# EAGLE board Power Up 4.0 (EAGLE 7.6.0)
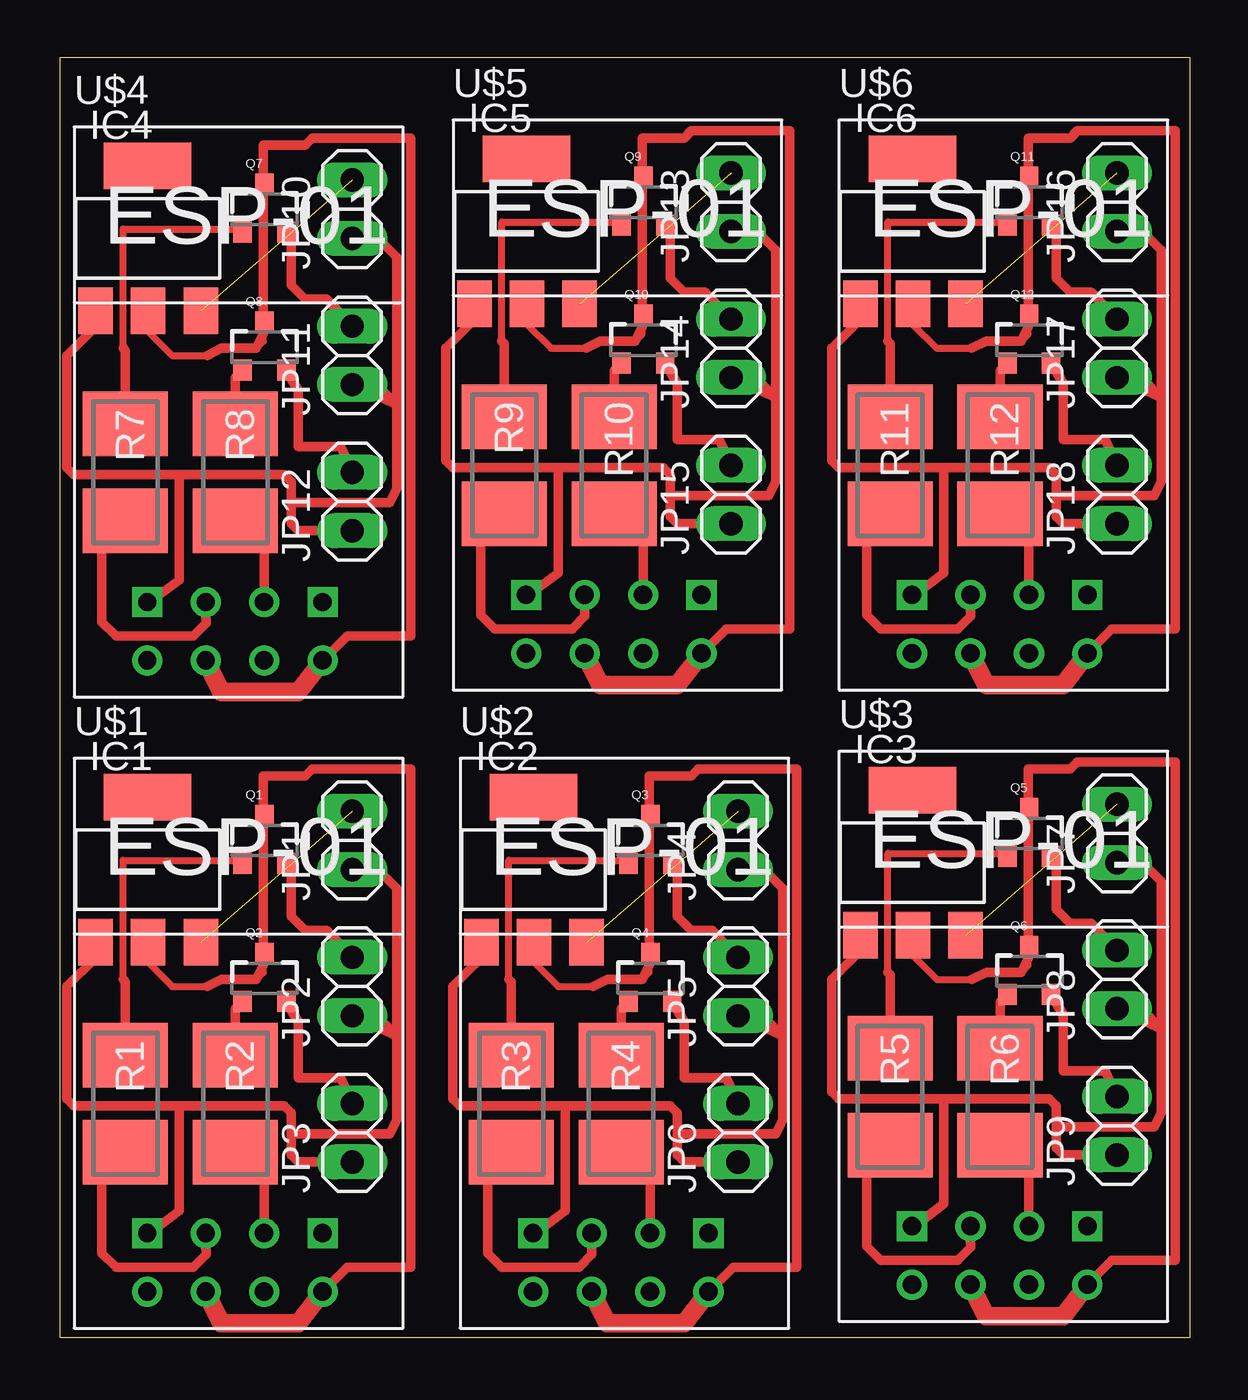
[diagram p0: board, top side]

Size 49.1 x 55.62 mm. Coordinates in mm from the lower left corner, seen from the top.
Outline: 0,0 49.1,0 49.1,55.62 0,55.62 0,0
Copper layers (1*16): Top 0.035mm / dielectric 1.5mm / Bottom 0.035mm
Design rules "default": minimum track width 10mil, minimum drill 24mil, track to track 8mil, track to pad 8mil, pad to pad 8mil, via to via 8mil, smd to smd 8mil, copper to edge 40mil, drill to drill 8mil, minimum pad ring 10mil, minimum via ring 8mil, stop-mask expansion 4mil, vias tented up to drill 0mil, thermal gap 10mil

## Footprints (pad centres in the part's own frame; a part is rotated, then mirrored left to right if it is on the bottom)
SOT223 = smd 1.499 x 2.007: 1 -2.261,-3.15; 2 0.025,-3.15; 3 2.311,-3.15 | smd 3.81 x 2.007: 4 0,3.15
1X02 = drill 1.016 long: 1 -1.27,0; 2 1.27,0
SOT23-3 = smd 0.8 x 0.9: 1 -0.95,-1; 2 0.95,-1; 3 0,1.1
SMS-WAV = smd 2.8 x 3.7: 1 2.108,0; 2 -2.108,0
ESP01 = drill 0.8: CH_PD -1.285,-8.178; GPIO0 1.255,-5.638; GPIO2 -1.285,-5.638; RST 1.255,-8.178; TX -3.825,-8.178; VCC 3.795,-8.178 | drill 0.8 square: GND -3.825,-5.638; RX 3.795,-5.638

## Placement (x,y rotation side)
IC1  REG1117  [SOT223]  3.81,20.32 0 top
IC2  REG1117  [SOT223]  20.57,20.32 0 top
IC3  REG1117  [SOT223]  37.03,20.62 0 top
IC4  REG1117  [SOT223]  3.81,47.75 0 top
IC5  REG1117  [SOT223]  20.27,48.06 0 top
IC6  REG1117  [SOT223]  37.03,48.06 0 top
JP1  Power  [1X02]  12.7,21.59 90 top
JP2  M1  [1X02]  12.7,15.24 90 top
JP3  M2  [1X02]  12.7,8.89 90 top
JP4  Power  [1X02]  29.46,21.59 90 top
JP5  M1  [1X02]  29.46,15.24 90 top
JP6  M2  [1X02]  29.46,8.89 90 top
JP7  Power  [1X02]  45.92,21.89 90 top
JP8  M1  [1X02]  45.92,15.54 90 top
JP9  M2  [1X02]  45.92,9.19 90 top
JP10  Power  [1X02]  12.7,49.02 90 top
JP11  M1  [1X02]  12.7,42.67 90 top
JP12  M2  [1X02]  12.7,36.32 90 top
JP13  Power  [1X02]  29.16,49.33 90 top
JP14  M1  [1X02]  29.16,42.98 90 top
JP15  M2  [1X02]  29.16,36.63 90 top
JP16  Power  [1X02]  45.92,49.33 90 top
JP17  M1  [1X02]  45.92,42.98 90 top
JP18  M2  [1X02]  45.92,36.63 90 top
Q1  MPSA42  [SOT23-3]  8.89,21.59 0 top
Q2  MPSA42  [SOT23-3]  8.89,15.6 0 top
Q3  MPSA42  [SOT23-3]  25.65,21.59 0 top
Q4  MPSA42  [SOT23-3]  25.65,15.6 0 top
Q5  MPSA42  [SOT23-3]  42.11,21.89 0 top
Q6  MPSA42  [SOT23-3]  42.11,15.9 0 top
Q7  MPSA42  [SOT23-3]  8.89,49.02 0 top
Q8  MPSA42  [SOT23-3]  8.89,43.03 0 top
Q9  MPSA42  [SOT23-3]  25.35,49.33 0 top
Q10  MPSA42  [SOT23-3]  25.35,43.33 0 top
Q11  MPSA42  [SOT23-3]  42.11,49.33 0 top
Q12  MPSA42  [SOT23-3]  42.11,43.33 0 top
R1  [SMS-WAV]  2.84,10.16 270 top
R2  [SMS-WAV]  7.62,10.16 270 top
R3  [SMS-WAV]  19.61,10.16 270 top
R4  [SMS-WAV]  24.38,10.16 270 top
R5  [SMS-WAV]  36.07,10.46 270 top
R6  [SMS-WAV]  40.84,10.46 270 top
R7  [SMS-WAV]  2.84,37.59 270 top
R8  [SMS-WAV]  7.62,37.59 270 top
R9  [SMS-WAV]  19.3,37.9 270 top
R10  [SMS-WAV]  24.08,37.9 270 top
R11  [SMS-WAV]  36.07,37.9 270 top
R12  [SMS-WAV]  40.84,37.9 270 top
U$1  ESP01  [ESP01]  7.62,10.16 0 top
U$2  ESP01  [ESP01]  24.38,10.16 0 top
U$3  ESP01  [ESP01]  40.84,10.46 0 top
U$4  ESP01  [ESP01]  7.62,37.59 0 top
U$5  ESP01  [ESP01]  24.08,37.9 0 top
U$6  ESP01  [ESP01]  40.84,37.9 0 top

## Library data of the parts
IC1-IC6 = burr-brown; MPN: REG1117; OC_FARNELL: 1097566; OC_NEWARK: 14P6981
JP1-JP18 = pinhead
Q1-Q12 = SparkFun-DiscreteSemi; PROD_ID: TRANS-09116
R1-R12 = resistor-shunt; OC_FARNELL: unknown; OC_NEWARK: unknown
U$1-U$6 = esp8266modules

## Nets
N$1: Q1.1 R1.2
N$2: Q2.1 R2.2
N$3: IC1.1 JP1.1 JP2.1 JP3.1 U$1.GND
N$4: IC1.2 Q1.3 Q2.3 U$1.CH_PD U$1.VCC
N$5: IC1.3 JP1.2
N$6: R1.1 U$1.GPIO2
N$7: R2.1 U$1.GPIO0
N$8: JP2.2 Q1.2
N$9: JP3.2 Q2.2
N$10: IC2.1 JP4.1 JP5.1 JP6.1 U$2.GND
N$11: IC2.2 Q3.3 Q4.3 U$2.CH_PD U$2.VCC
N$12: IC2.3 JP4.2
N$13: Q3.1 R3.2
N$14: Q4.1 R4.2
N$15: R3.1 U$2.GPIO2
N$16: R4.1 U$2.GPIO0
N$17: JP5.2 Q3.2
N$18: JP6.2 Q4.2
N$19: IC3.1 JP7.1 JP8.1 JP9.1 U$3.GND
N$20: IC3.2 Q5.3 Q6.3 U$3.CH_PD U$3.VCC
N$21: IC3.3 JP7.2
N$22: Q5.1 R5.2
N$23: Q6.1 R6.2
N$24: R5.1 U$3.GPIO2
N$25: R6.1 U$3.GPIO0
N$26: JP8.2 Q5.2
N$27: JP9.2 Q6.2
N$28: IC4.1 JP10.1 JP11.1 JP12.1 U$4.GND
N$29: IC4.2 Q7.3 Q8.3 U$4.CH_PD U$4.VCC
N$30: IC4.3 JP10.2
N$31: Q7.1 R7.2
N$32: Q8.1 R8.2
N$33: R7.1 U$4.GPIO2
N$34: R8.1 U$4.GPIO0
N$35: JP11.2 Q7.2
N$36: JP12.2 Q8.2
N$37: IC5.1 JP13.1 JP14.1 JP15.1 U$5.GND
N$38: IC5.2 Q9.3 Q10.3 U$5.CH_PD U$5.VCC
N$39: IC5.3 JP13.2
N$40: Q9.1 R9.2
N$41: Q10.1 R10.2
N$42: R9.1 U$5.GPIO2
N$43: R10.1 U$5.GPIO0
N$44: JP14.2 Q9.2
N$45: JP15.2 Q10.2
N$46: IC6.1 JP16.1 JP17.1 JP18.1 U$6.GND
N$47: IC6.2 Q11.3 Q12.3 U$6.CH_PD U$6.VCC
N$48: IC6.3 JP16.2
N$49: Q11.1 R11.2
N$50: Q12.1 R12.2
N$51: R11.1 U$6.GPIO2
N$52: R12.1 U$6.GPIO0
N$53: JP17.2 Q11.2
N$54: JP18.2 Q12.2

## Tracks (layer width: path | path; a pad name or v marks a point on that pad's centre or on a via)
N$1
  Top 0.305: 2.74,15.54 2.74,20.73 7.8,20.73 Q1.1
  Top 0.406: R1.2 2.85,15.44 2.74,15.54
N$2
  Top 0.406: R2.2 7.62,14.28 Q2.1
N$3
  Top 0.406: U$1.GND 3.91,4.52 5.18,5.49 5.18,10.06 | 5.18,10.06 9.75,10.06 10.06,9.75 10.06,8.84 | 10.06,8.84 10.06,7.92 10.36,7.62 JP3.1 | IC1.1 1.55,16.48 0.3,15.24 0.3,10.36 0.61,10.06 5.18,10.06 | 10.06,8.84 14.33,8.84 14.63,9.45 14.63,13.11 | 14.63,13.11 JP2.1 13.77,13.97 14.63,13.11 | 14.63,13.11 14.63,19.51 14.02,20.12 12.9,20.12 JP1.1
N$4
  Top 0.305: IC1.2 3.83,16.28 4.88,15.24 6.4,15.24 | 8.53,15.54 8.84,15.85 8.84,16.15 8.84,16.64 Q2.3 Q1.3
  Top 0.406: 6.4,15.24 7.01,15.54 8.53,15.54 8.84,16.15 8.84,24.38 10.67,24.38 10.97,24.69 15.24,24.69 15.24,3.05 12.48,3.05 U$1.VCC
  Top 0.813: U$1.CH_PD 7.01,0.61 10.36,0.61 U$1.VCC
N$5  (1 unrouted)
N$6
  Top 0.406: U$1.GPIO2 6.33,3.83 6.35,3.81 6.35,3.61 5.79,3.05 2.44,3.05 1.83,3.66 1.83,7.34 R1.1
N$7
  Top 0.406: U$1.GPIO0 8.88,6.8 R2.1
N$8
  Top 0.406: JP2.2 11.58,17.68 10.67,17.68 10.06,18.29 10.06,20.37 Q1.2
N$9
  Top 0.406: JP3.2 12.19,11.28 10.36,11.28 10.36,13.72 Q2.2
N$10
  Top 0.406: U$2.GND 20.68,4.52 21.95,5.49 21.95,10.06 | 21.95,10.06 26.52,10.06 26.82,9.75 26.82,8.84 | 26.82,8.84 26.82,7.92 27.13,7.62 JP6.1 | IC2.1 18.31,16.48 17.07,15.24 17.07,10.36 17.37,10.06 21.95,10.06 | 26.82,8.84 31.09,8.84 31.39,9.45 31.39,13.11 | 31.39,13.11 JP5.1 30.53,13.97 31.39,13.11 | 31.39,13.11 31.39,19.51 30.79,20.12 29.67,20.12 JP4.1
N$11
  Top 0.305: IC2.2 20.6,16.28 21.64,15.24 23.16,15.24 | 25.3,15.54 25.6,15.85 25.6,16.15 25.6,16.64 Q4.3 Q3.3
  Top 0.406: 23.16,15.24 23.77,15.54 25.3,15.54 25.6,16.15 25.6,24.38 27.43,24.38 27.74,24.69 32,24.69 32,3.05 29.24,3.05 U$2.VCC
  Top 0.813: U$2.CH_PD 23.77,0.61 27.13,0.61 U$2.VCC
N$12  (1 unrouted)
N$13
  Top 0.305: 19.51,15.54 19.51,20.73 24.57,20.73 Q3.1
  Top 0.406: R3.2 19.61,15.44 19.51,15.54
N$14
  Top 0.406: R4.2 24.38,14.28 Q4.1
N$15
  Top 0.406: U$2.GPIO2 23.1,3.83 23.11,3.81 23.11,3.61 22.55,3.05 19.2,3.05 18.59,3.66 18.59,7.34 R3.1
N$16
  Top 0.406: U$2.GPIO0 25.64,6.8 R4.1
N$17
  Top 0.406: JP5.2 28.35,17.68 27.43,17.68 26.82,18.29 26.82,20.37 Q3.2
N$18
  Top 0.406: JP6.2 28.96,11.28 27.13,11.28 27.13,13.72 Q4.2
N$19
  Top 0.406: U$3.GND 37.14,4.83 38.41,5.79 38.41,10.36 | 38.41,10.36 42.98,10.36 43.28,10.06 43.28,9.14 | 43.28,9.14 43.28,8.23 43.59,7.92 JP9.1 | IC3.1 34.77,16.79 33.53,15.54 33.53,10.67 33.83,10.36 38.41,10.36 | 43.28,9.14 47.55,9.14 47.85,9.75 47.85,13.41 | 47.85,13.41 JP8.1 46.99,14.28 47.85,13.41 | 47.85,13.41 47.85,19.81 47.24,20.42 46.13,20.42 JP7.1
N$20
  Top 0.305: IC3.2 37.06,16.59 38.1,15.54 39.62,15.54 | 41.76,15.85 42.06,16.15 42.06,16.46 42.06,16.95 Q6.3 Q5.3
  Top 0.406: 39.62,15.54 40.23,15.85 41.76,15.85 42.06,16.46 42.06,24.69 43.89,24.69 44.2,24.99 48.46,24.99 48.46,3.35 45.7,3.35 U$3.VCC
  Top 0.813: U$3.CH_PD 40.23,0.91 43.59,0.91 U$3.VCC
N$21  (1 unrouted)
N$22
  Top 0.305: 35.97,15.85 35.97,21.03 41.03,21.03 Q5.1
  Top 0.406: R5.2 36.07,15.75 35.97,15.85
N$23
  Top 0.406: R6.2 40.84,14.58 Q6.1
N$24
  Top 0.406: U$3.GPIO2 39.56,4.13 39.57,4.12 39.57,3.91 39.01,3.35 35.66,3.35 35.05,3.96 35.05,7.64 R5.1
N$25
  Top 0.406: U$3.GPIO0 42.1,7.1 R6.1
N$26
  Top 0.406: JP8.2 44.81,17.98 43.89,17.98 43.28,18.59 43.28,20.68 Q5.2
N$27
  Top 0.406: JP9.2 45.41,11.58 43.59,11.58 43.59,14.02 Q6.2
N$28
  Top 0.406: U$4.GND 3.91,31.95 5.18,32.92 5.18,37.49 | 5.18,37.49 9.75,37.49 10.06,37.19 10.06,36.27 | 10.06,36.27 10.06,35.36 10.36,35.05 JP12.1 | IC4.1 1.55,43.92 0.3,42.67 0.3,37.8 0.61,37.49 5.18,37.49 | 10.06,36.27 14.33,36.27 14.63,36.88 14.63,40.54 | 14.63,40.54 JP11.1 13.77,41.4 14.63,40.54 | 14.63,40.54 14.63,46.94 14.02,47.55 12.9,47.55 JP10.1
N$29
  Top 0.305: IC4.2 3.83,43.71 4.88,42.67 6.4,42.67 | 8.53,42.98 8.84,43.28 8.84,43.59 8.84,44.08 Q8.3 Q7.3
  Top 0.406: 6.4,42.67 7.01,42.98 8.53,42.98 8.84,43.59 8.84,51.82 10.67,51.82 10.97,52.12 15.24,52.12 15.24,30.48 12.48,30.48 U$4.VCC
  Top 0.813: U$4.CH_PD 7.01,28.04 10.36,28.04 U$4.VCC
N$30  (1 unrouted)
N$31
  Top 0.305: 2.74,42.98 2.74,48.16 7.8,48.16 Q7.1
  Top 0.406: R7.2 2.85,42.88 2.74,42.98
N$32
  Top 0.406: R8.2 7.62,41.71 Q8.1
N$33
  Top 0.406: U$4.GPIO2 6.33,31.26 6.35,31.24 6.35,31.04 5.79,30.48 2.44,30.48 1.83,31.09 1.83,34.77 R7.1
N$34
  Top 0.406: U$4.GPIO0 8.88,34.23 R8.1
N$35
  Top 0.406: JP11.2 11.58,45.11 10.67,45.11 10.06,45.72 10.06,47.8 Q7.2
N$36
  Top 0.406: JP12.2 12.19,38.71 10.36,38.71 10.36,41.15 Q8.2
N$37
  Top 0.406: U$5.GND 20.37,32.26 21.64,33.22 21.64,37.8 | 21.64,37.8 26.21,37.8 26.52,37.49 26.52,36.58 | 26.52,36.58 26.52,35.66 26.82,35.36 JP15.1 | IC5.1 18.01,44.22 16.76,42.98 16.76,38.1 17.07,37.8 21.64,37.8 | 26.52,36.58 30.79,36.58 31.09,37.19 31.09,40.84 | 31.09,40.84 JP14.1 30.23,41.71 31.09,40.84 | 31.09,40.84 31.09,47.24 30.48,47.85 29.36,47.85 JP13.1
N$38
  Top 0.305: IC5.2 20.3,44.02 21.34,42.98 22.86,42.98 | 24.99,43.28 25.3,43.59 25.3,43.89 25.3,44.38 Q10.3 Q9.3
  Top 0.406: 22.86,42.98 23.47,43.28 24.99,43.28 25.3,43.89 25.3,52.12 27.13,52.12 27.43,52.43 31.7,52.43 31.7,30.79 28.94,30.79 U$5.VCC
  Top 0.813: U$5.CH_PD 23.47,28.35 26.82,28.35 U$5.VCC
N$39  (1 unrouted)
N$40
  Top 0.305: 19.2,43.28 19.2,48.46 24.26,48.46 Q9.1
  Top 0.406: R9.2 19.3,43.18 19.2,43.28
N$41
  Top 0.406: R10.2 24.08,42.01 Q10.1
N$42
  Top 0.406: U$5.GPIO2 22.79,31.56 22.81,31.55 22.81,31.34 22.25,30.79 18.9,30.79 18.29,31.39 18.29,35.08 R9.1
N$43
  Top 0.406: U$5.GPIO0 25.33,34.53 R10.1
N$44
  Top 0.406: JP14.2 28.04,45.41 27.13,45.41 26.52,46.02 26.52,48.11 Q9.2
N$45
  Top 0.406: JP15.2 28.65,39.01 26.82,39.01 26.82,41.45 Q10.2
N$46
  Top 0.406: U$6.GND 37.14,32.26 38.41,33.22 38.41,37.8 | 38.41,37.8 42.98,37.8 43.28,37.49 43.28,36.58 | 43.28,36.58 43.28,35.66 43.59,35.36 JP18.1 | IC6.1 34.77,44.22 33.53,42.98 33.53,38.1 33.83,37.8 38.41,37.8 | 43.28,36.58 47.55,36.58 47.85,37.19 47.85,40.84 | 47.85,40.84 JP17.1 46.99,41.71 47.85,40.84 | 47.85,40.84 47.85,47.24 47.24,47.85 46.13,47.85 JP16.1
N$47
  Top 0.305: IC6.2 37.06,44.02 38.1,42.98 39.62,42.98 | 41.76,43.28 42.06,43.59 42.06,43.89 42.06,44.38 Q12.3 Q11.3
  Top 0.406: 39.62,42.98 40.23,43.28 41.76,43.28 42.06,43.89 42.06,52.12 43.89,52.12 44.2,52.43 48.46,52.43 48.46,30.79 45.7,30.79 U$6.VCC
  Top 0.813: U$6.CH_PD 40.23,28.35 43.59,28.35 U$6.VCC
N$48  (1 unrouted)
N$49
  Top 0.305: 35.97,43.28 35.97,48.46 41.03,48.46 Q11.1
  Top 0.406: R11.2 36.07,43.18 35.97,43.28
N$50
  Top 0.406: R12.2 40.84,42.01 Q12.1
N$51
  Top 0.406: U$6.GPIO2 39.56,31.56 39.57,31.55 39.57,31.34 39.01,30.79 35.66,30.79 35.05,31.39 35.05,35.08 R11.1
N$52
  Top 0.406: U$6.GPIO0 42.1,34.53 R12.1
N$53
  Top 0.406: JP17.2 44.81,45.41 43.89,45.41 43.28,46.02 43.28,48.11 Q11.2
N$54
  Top 0.406: JP18.2 45.41,39.01 43.59,39.01 43.59,41.45 Q12.2